# Altium PCB Project.PcbDoc
Units mm, origin at the board's own origin, x right, y up, seen from the top; angles counter-clockwise.
Board outline 49.15 x 37.34 mm, 2 copper layers (Top Layer, Bottom Layer); 34 components, 26 nets, 189 pads, 22 vias.
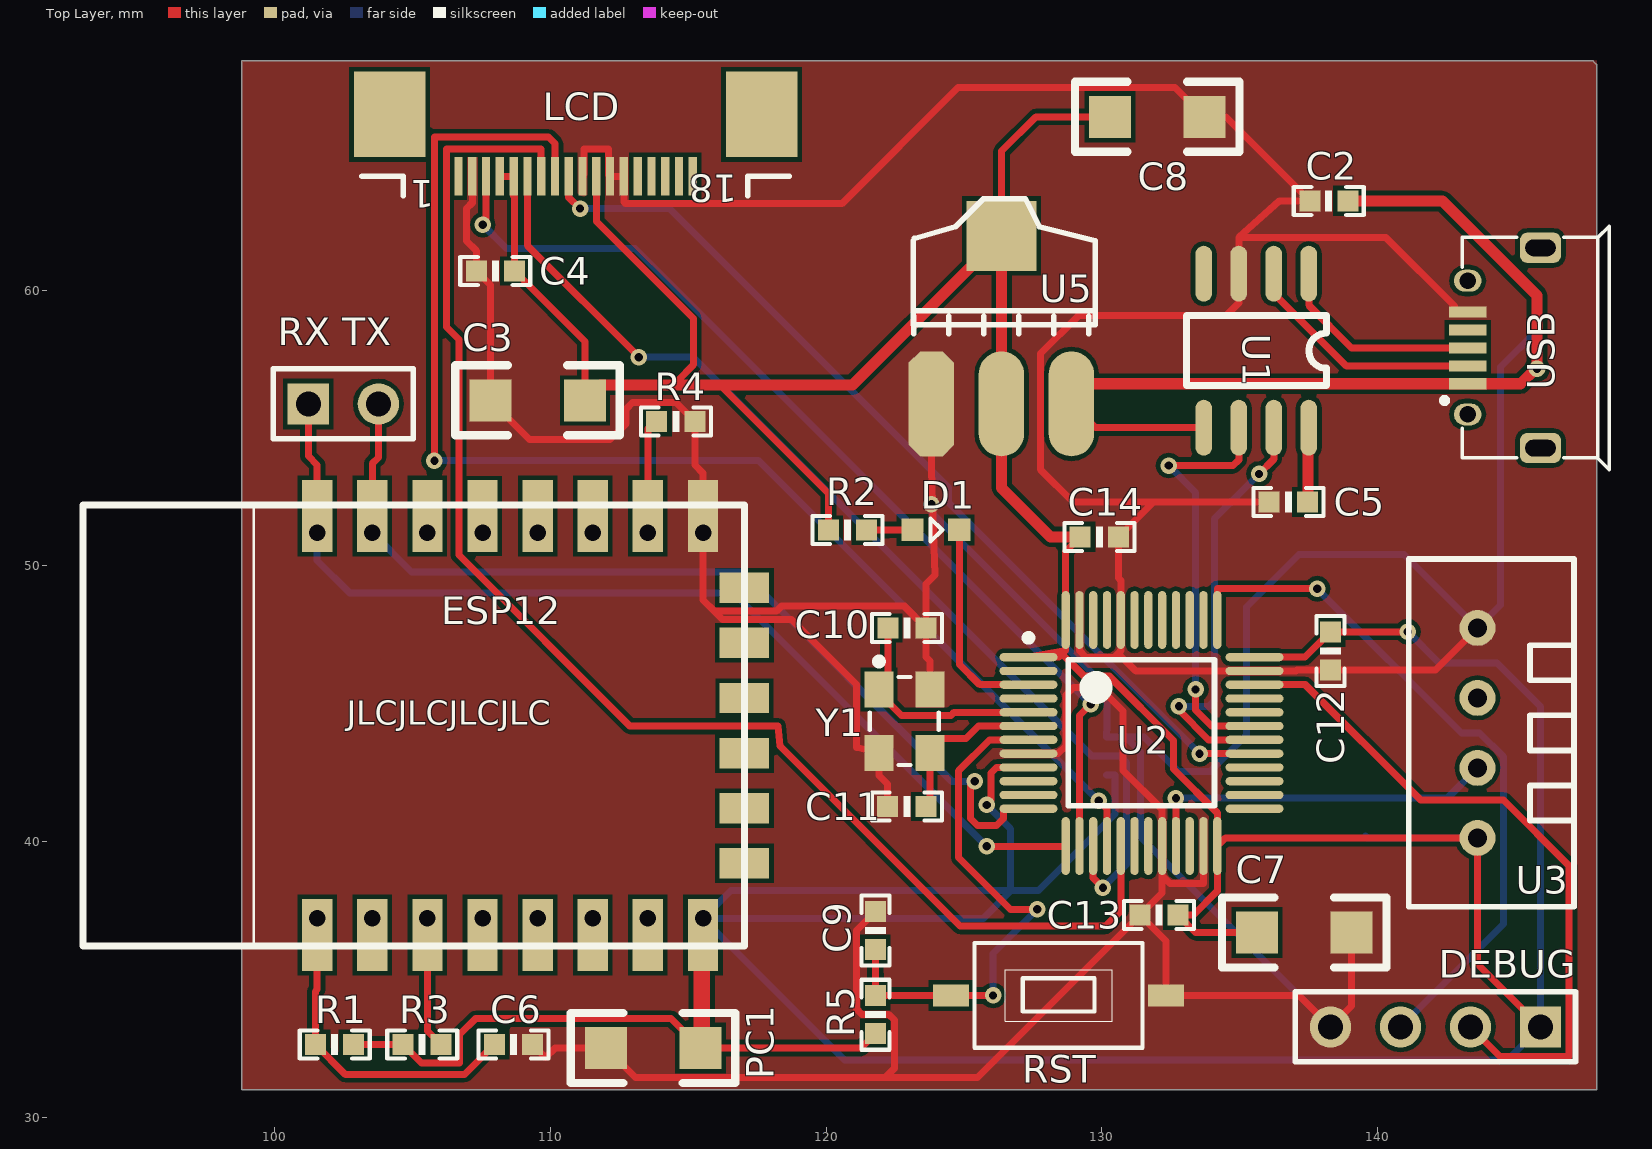
[diagram p0: Top Layer view]
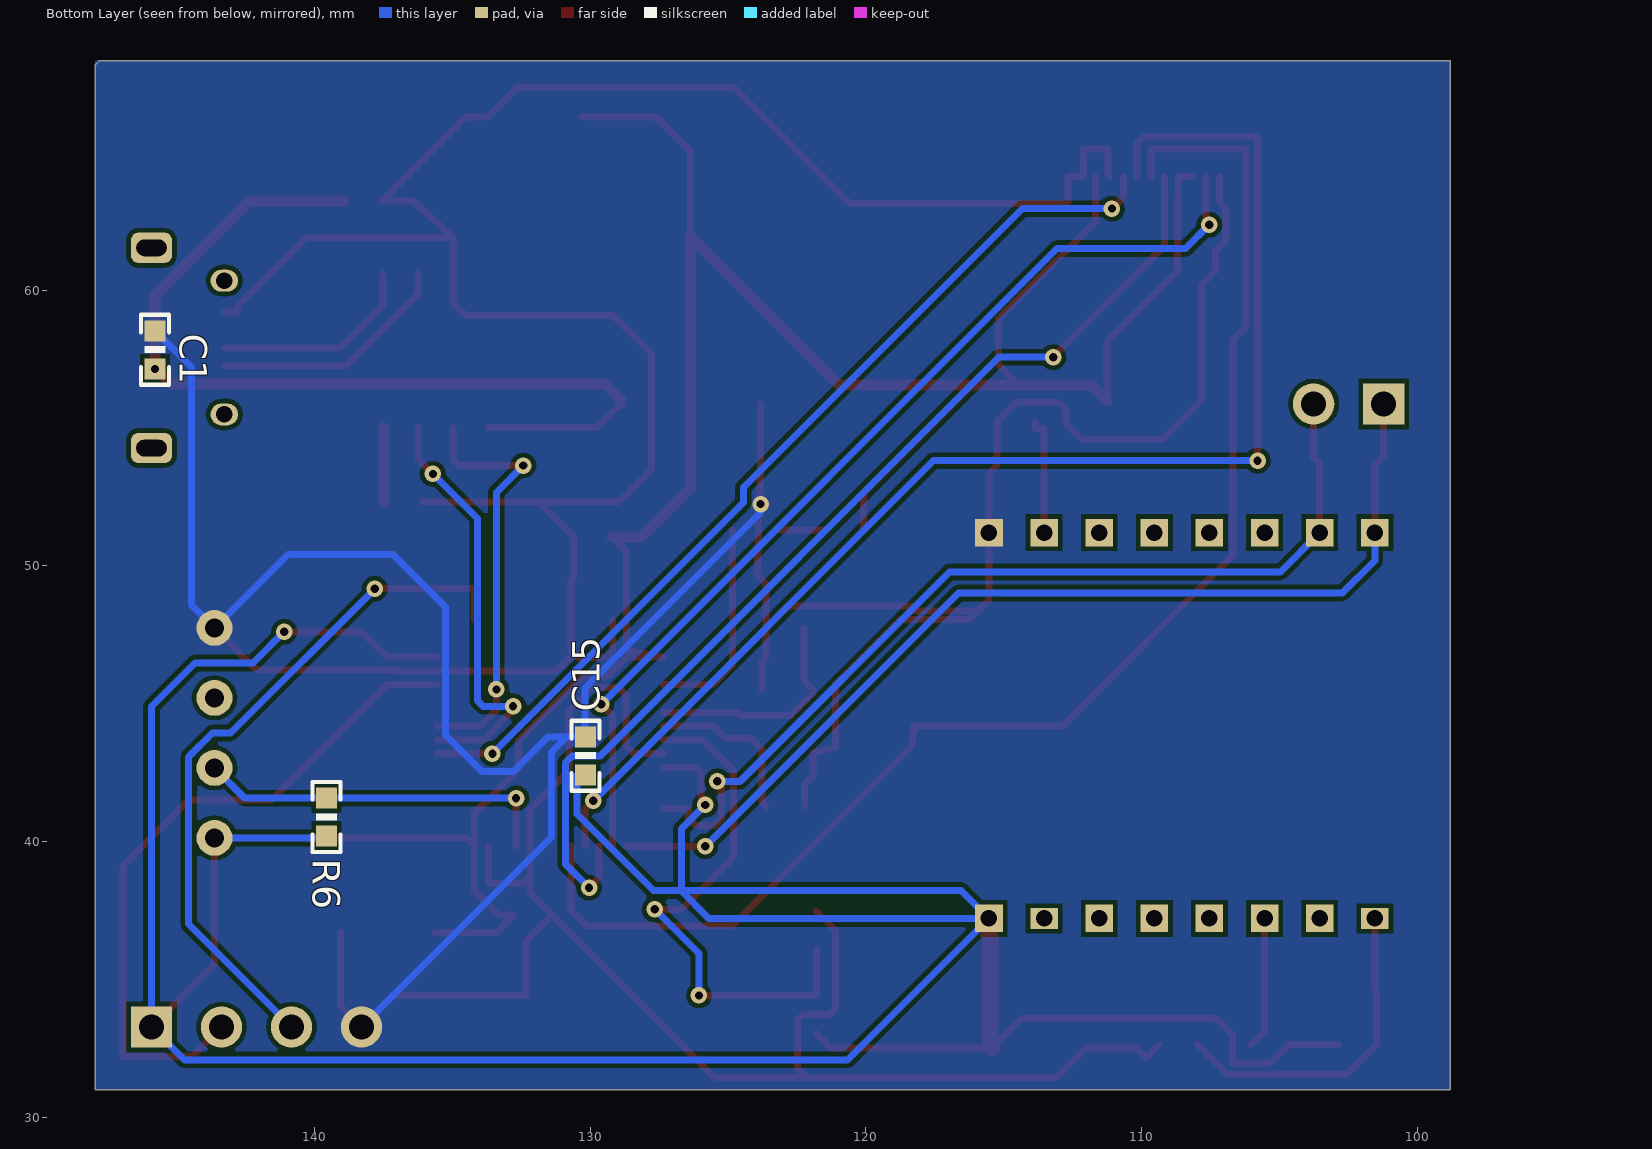
[diagram p1: Bottom Layer view, seen from below]

## Layer stack, top to bottom
Top Solder: solder mask 0.0102, Solder Resist, Dk 3.5
Top Layer: signal copper 0.0356
Dielectric 1: dielectric 0.32, FR-4, Dk 4.8
Bottom Layer: signal copper 0.0356
Bottom Solder: solder mask 0.0102, Solder Resist, Dk 3.5

## Board outline
98.806,30.988 98.806,68.326 147.828,68.326 147.955,68.199 147.955,30.988

## Design rules (kind name [scope] priority, off if disabled: settings)
Clearance [All] p1: gap=0.16 ignorepadtopadclearanceinfootprint=FALSE
PlaneConnect [All] p1: planeconnectstyle=Direct reliefexpansion=0.508 reliefentries=4 reliefconductorwidth=0.254 reliefairgap=0.254
PolygonConnect [All] p1: connectstyle=Direct reliefconductorwidth=0.254 reliefentries=4 polygonreliefangle="90 Angle" airgapwidth=0.254
RoutingVias [All] p1: holewidth=0.3 width=0.6 viastyle="Through Hole" minholewidth=0.3 minwidth=0.6 maxholewidth=0.711 maxwidth=1.27
SolderMaskExpansion [All] p1: expansion=0.102
Width [All] p1: maxlimit=1 minlimit=0.16 preferedwidth=0.254
29 further rules are at their usual default settings.

## Components (designator, comment, footprint, x,y, rotation, side; value= is the part's Value field where it differs from the comment)
C1 "Cap" 0603P 145.794,57.848 r270 bottom value=0.1uF
C2 "Cap" 0603P 138.239,63.248 r0 top value=0.1uF
C3 "Cap" 1206 107.823,56.007 r0 top value=0.1uF
C4 "Cap" 0603P 108.001,60.706 r0 top value=0.1uF
C5 "Cap" 0603P 136.779,52.324 r180 top value=0.1uF
C6 "Cap" 0603P 108.661,32.639 r180 top value=0.1uF
C7 "Cap" 1206 139.065,36.703 r180 top value=10uF
C8 "Cap" 1206 133.731,66.294 r180 top value=10uF
C9 "Cap" 0603P 121.793,36.779 r270 top value=0.1uF
C10 "Cap" 0603P 122.936,47.752 r0 top value=22pF
C11 "Cap" 0603P 122.936,41.275 r180 top value=22pF
C12 "Cap" 0603P 138.303,46.914 r90 top value=0.1uF
C13 "Cap" 0603P 132.08,37.338 r0 top value=0.1uF
C14 "Cap" 0603P 129.921,51.054 r180 top value=0.1uF
C15 "Cap" 0603P 130.173,43.116 r270 bottom value=0.1uF
D1 "LED0" SMDLED-0603 123.138,51.308 r0 top
DEBUG "Header 4" HDR1X4 145.923,33.274 r180 top (schematic designator P2)
ESP12 "ESP12" "ESP-12E&F Module" 109.287,44.211 r90 top (schematic designator U4)
LCD "1.8寸SPI屏" "FPC0.5 18Pin" 111.085,66.694 r180 top (schematic designator *1)
PC1 "" 1206 115.443,32.512 r180 top value=10uF
R1 "10K" 0603P 102.171,32.637 r180 top
R2 "Res2" 0603P 120.777,51.308 r0 top value=1K
R3 "1K" 0603P 105.346,32.637 r180 top
R4 "1K" 0603P 114.554,55.245 r180 top
R5 "" 0603P 121.791,33.718 r90 top value=10K
R6 "10K" 0603P 139.573,40.894 r270 bottom
RST "KEY" KEY_SOP3625 132.334,34.417 r180 top (schematic designator K1)
"RX TX" "Header 2" HDR1X2 101.219,55.88 r0 top (schematic designator P1)
U1 "CH330N" sop8 137.541,60.579 r270 top
U2 "STM32F103C8T6" LQFP-48 131.445,43.942 r0 top
U3 "DHT11" DHT11 143.637,40.132 r90 top
U5 "AMS1117-3.3" AMS1117 123.824,55.882 r0 top locked
USB "USB-AB" USB_AB 145.923,57.912 r270 top (schematic designator USB?)
Y1 "25Mhz" XTAL3225 121.92,45.518 r270 top

## Footprints (in the part's own frame and the unit in brackets; to place one, negate y for a bottom-side part, rotate by r counter-clockwise, add the part's x,y. Pads: shape width x height; smd on the part's side, far side on the other; paste and mask are expansions set on the pad)
0603P [mil]
  rect 30x30 smd: 1(-27,0) 2(27.5,-0.06)
  silkscreen extent -50,-20 50,20
1206 [mil]
  rect 60x60 smd: 1(0,0) 2(135,0)
  silkscreen extent -50,-50 185,50
AMS1117 [mil]
  oct 65x150 smd: 1(0.03,-0.06)
  oval 65x150 smd: 2(100.03,-0.06) 3(200.03,-0.06)
  rect 100x100 smd: 4(100.03,239.94)
  silkscreen extent -26,100 234,293
DHT11 [mm]
  round 1.3 hole 0.7: 1(0,0) 2(2.54,0) 3(5.08,0) 4(7.62,0)
  silkscreen extent -2.5,-3.5 10.12,2.5
"ESP-12E&F Module" [mm]
  rect 2.6x1.1 smd: 1(-7.6,7.75) 2(-7.6,5.75) 3(-7.6,3.75) 4(-7.6,1.75) 5(-7.6,-0.25) 6(-7.6,-2.25) 7(-7.6,-4.25) 8(-7.6,-6.25) 15(7.6,-6.25) 16(7.6,-4.25) 17(7.6,-2.25) 18(7.6,-0.25) 19(7.6,1.75) 20(7.6,3.75) 21(7.6,5.75) 22(7.6,7.75)
  rect 0.762x1 hole 0.6: 1(-7,7.75) 7(-7,-4.25)
  rect 0.762x1 / inner rect 0.762x1 / far side rect 1x1 hole 0.6: 2(-7,5.75) 3(-7,3.75) 4(-7,1.75) 5(-7,-0.25) 6(-7,-2.25) 8(-7,-6.25) 15(7,-6.25) 16(7,-4.25) 17(7,-2.25) 18(7,-0.25) 19(7,1.75) 20(7,3.75) 21(7,5.75) 22(7,7.75)
  rect 1.1x1.8 smd: 9(-5,-7.75) 10(-3,-7.75) 11(-1,-7.75) 12(1,-7.75) 13(3,-7.75) 14(5,-7.75)
  silkscreen extent -8,-7.75 8,16.25
"FPC0.5 18Pin" [mm]
  rect 2.6x3.1 smd: 0(-6.58,0.309) 0(6.92,0.309)
  rect 0.3x1.4 smd: 1(4.42,2.559) 2(3.92,2.559) 3(3.42,2.559) 4(2.92,2.559) 5(2.42,2.559) 6(1.92,2.559) 7(1.42,2.559) 8(0.92,2.559) 9(0.42,2.559) 10(-0.08,2.559) 11(-0.58,2.559) 12(-1.08,2.559) 13(-1.58,2.559) 14(-2.08,2.559) 15(-2.58,2.559) 16(-3.08,2.559) 17(-3.58,2.559) 18(-4.08,2.559)
  silkscreen extent -7.58,2.56 7.92,3.26
HDR1X2 [mm] "Connector; Header; 2 Position"
  rect 1.5x1.5 hole 0.9: 1(0,0)
  round 1.5 hole 0.9: 2(2.54,0)
  silkscreen extent -1.27,-1.27 3.81,1.27
HDR1X4 [mm] "Connector; Header; 4 Position"
  rect 1.5x1.5 hole 0.9: 1(0,0)
  round 1.5 hole 0.9: 2(2.54,0) 3(5.08,0) 4(7.62,0)
  silkscreen extent -1.27,-1.27 8.89,1.27
KEY_SOP3625 [mm]
  rect 1.3x0.8 smd: 1(0,0) 2(7.8,0)
  silkscreen extent 0.85,-1.9 6.95,1.9
LQFP-48 [mm] "LQFP"
  oval 2.1x0.3 smd: 1(-4.1,2.75) 2(-4.1,2.25) 3(-4.1,1.75) 4(-4.1,1.25) 5(-4.1,0.75) 6(-4.1,0.25) 7(-4.1,-0.25) 8(-4.1,-0.75) 9(-4.1,-1.25) 10(-4.1,-1.75) 11(-4.1,-2.25) 12(-4.1,-2.75) 25(4.1,-2.75) 26(4.1,-2.25) 27(4.1,-1.75) 28(4.1,-1.25) 29(4.1,-0.75) 30(4.1,-0.25) 31(4.1,0.25) 32(4.1,0.75) 33(4.1,1.25) 34(4.1,1.75) 35(4.1,2.25) 36(4.1,2.75)
  oval 0.3x2.1 smd: 13(-2.75,-4.1) 14(-2.25,-4.1) 15(-1.75,-4.1) 16(-1.25,-4.1) 17(-0.75,-4.1) 18(-0.25,-4.1) 19(0.25,-4.1) 20(0.75,-4.1) 21(1.25,-4.1) 22(1.75,-4.1) 23(2.25,-4.1) 24(2.75,-4.1) 37(2.75,4.1) 38(2.25,4.1) 39(1.75,4.1) 40(1.25,4.1) 41(0.75,4.1) 42(0.25,4.1) 43(-0.25,4.1) 44(-0.75,4.1) 45(-1.25,4.1) 46(-1.75,4.1) 47(-2.25,4.1) 48(-2.75,4.1)
  silkscreen extent -4.22,-2.65 2.65,3.57, body extent -3.5,-3.5 3.5,3.5, height 1.6
SMDLED-0603 [mil]
  rect 32x32 smd: 1(0,0) 2(66.93,0)
  silkscreen extent 26,-17 42,17
sop8 [mil]
  oval 80x24 smd: 1(-1,-1) 2(-1,-51) 3(-1,-101) 4(-1,-151) 5(219,-151) 6(219,-101) 7(219,-51) 8(219,-1)
  silkscreen extent 59,-176 159,24, body extent -9,-174 229,24, height 63
USB_AB [mm]
  rect 0.4x1.35 smd: 1(1.3,-2.642) 2(0.65,-2.642) 3(0,-2.642) 4(-0.65,-2.642) 5(-1.3,-2.642)
  oval 0.8x1 hole 0.6: 6(-2.438,-2.642) 9(2.413,-2.642)
  rrect50% 1.1x1.5 hole 0.6 slot 1.1 at 90 deg: 7(-3.632,0) 8(3.632,0)
  silkscreen extent -4.42,-3.58 4.42,2.49
XTAL3225 [mm]
  rect 1.3x1.05 smd: 1(0,0) 2(2.3,0) 3(2.3,1.85) 4(0,1.85)
  silkscreen extent -1.14,-0.33 2.74,2.17

## Part data
C1 C2 C3 C4 C5 C6 C7 C8 C9 C10 C11 C12 C13 C14 C15: "Capacitor", LatestRevisionDate=17-Jul-2002, LatestRevisionNote="Re-released for DXP Platform.", PackageDescription="Radial Cap, Thru-Hole; 2 Leads; 0.3 in Pin Spacing", PackageReference=RAD-0.3, Published=8-Jun-2000, Publisher="Altium Limited"
D1: "Typical INFRARED GaAs LED", LatestRevisionDate=08-Jul-2005, LatestRevisionNote="Mech Layer 1 removed.", PackageDescription="LED; 2 Leads", PackageReference=LED-0, Published=8-Jun-2000, Publisher="Altium Limited"
DEBUG: "Header, 4-Pin", LatestRevisionDate=17-Jul-2002, LatestRevisionNote="Re-released for DXP Platform.", Publisher="Altium Limited"
ESP12: library part "ESP-12E&F Module", "ESP-12E&F Module"
PC1: library part "Cap Pol3", "Polarized Capacitor (Surface Mount)", LatestRevisionDate=29-May-2009, LatestRevisionNote="IPC-7351 Footprint Added.", PackageDescription="Chip Capacitor", PackageReference=C0805, Published=8-Jun-2000, Publisher="Altium Limited"
R1 R3 R4 R6: library part R
R2: "Resistor", LatestRevisionDate=17-Jul-2002, LatestRevisionNote="Re-released for DXP Platform.", PackageDescription="Axial Device, Thru-Hole; 2 Leads; 0.4 in Pin Spacing", PackageReference=AXIAL-0.4, Published=8-Jun-2000, Publisher="Altium Limited"
R5: library part Res2, "Resistor", LatestRevisionDate=17-Jul-2002, LatestRevisionNote="Re-released for DXP Platform.", PackageReference=AXIAL-0.4, Published=8-Jun-2000, Publisher="Altium Limited"
RST: library part KEY_2, "Switch", LatestRevisionDate=17-Jul-2002, LatestRevisionNote="Re-released for DXP Platform.", PackageReference=SPST-2, Published=24-Mar-1999, Publisher="Altium Limited"
"RX TX": "Header, 2-Pin", LatestRevisionDate=17-Jul-2002, LatestRevisionNote="Re-released for DXP Platform.", Publisher="Altium Limited"
U3: "数字温湿度传感器"
U5: library part AMS1117
USB: "MicroUSB"
Y1: library part XTAL_3225, "3225贴片无源晶振"

## Via types
v1: diameter 0.6, hole 0.3, Top Layer to Bottom Layer, tented both sides, 22 vias

## Nets (pads, with @x,y where several pads share a name; then routed paths per layer and width w, separated by ;. In a path a pad name is that pad's centre, name@x,y a point inside that pad or via, vN(x,y) a via of type N, cw(c..) or ccw(c..) an arc to the next point about the centre after c; other vN are vias at no path point)
5V: C1.2 C2.2 U1.5 U5.3 USB.1 | length 33.6
  Top Layer w0.254: U5.3 129.769,55.016 U1.5
  Top Layer w0.4: U5.3 128.905,56.034 129.483,56.612 USB.1 145.204,56.612 145.742,57.15 v1(145.796,57.15) 145.796,59.817 142.367,63.246 C2.2
DATA: R6.1 U2.21 U3.2 | length 13.1
  Top Layer w0.254: U2.21 v1(132.695,41.574)
  Bottom Layer w0.254: v1(132.695,41.574) 142.539,41.574 U3.2
ESP_RST: C6.2 ESP12.1 R1.2 | length 12
  Top Layer w0.254: ESP12.1@101.537,37.211 101.537,36.611 101.537,34.633 101.473,34.569 R1.2 102.557,31.555 106.877,31.555 C6.2
GND: C1.1 C2.1 C3.1 C4.1 C5.2 C6.1 C7.1 C8.1 C9.1 C10.2 C11.2 C12.1 C13.1 C14.1 C15.1 DEBUG.4 ESP12.15 LCD.2 LCD.10 LCD.12 LCD.13 PC1.2 R4.1 RST.1 U1.3 U2.8 U2.20 U2.23 U2.35 U2.44 U2.47 U3.4 U5.1 USB.5 Y1.2 Y1.4 | length 268.7
  Top Layer w0.254: LCD.2 107.165,63.178 106.957,62.969 106.957,61.795 107.315,61.437 C4.1 107.823,60.198 C3.1 109.245,54.585 112.166,54.585 112.751,55.169 112.751,55.702 112.979,55.931 114.554,55.931 R4.1 115.24,53.663 115.537,53.365 115.537,51.811 115.537,51.211 115.537,48.768 115.943,48.362 ; C6.1 109.825,32.161 110.175,32.512 PC1.2 113.081,31.445 122.149,31.445 ; LCD.10 111.227,64.197 111.227,65.126 112.116,65.126 112.116,64.184 LCD.12 LCD.13 112.665,63.211 112.732,63.144 120.574,63.144 124.79,67.361 132.664,67.361 C8.1 134.507,66.294 C2.1 136.45,63.248 134.976,61.925 ; C9.1 121.107,36.779 121.107,33.934 121.31,33.731 122.276,33.731 122.479,33.528 122.479,31.775 122.149,31.445 ; C11.2 122.237,42.088 121.92,42.405 Y1.2 121.107,43.422 121.107,45.695 118.745,48.057 116.248,48.057 115.943,48.362 ; Y1.4 123.77,46.558 123.634,46.694 C10.2 ; v1(123.825,52.248) 123.867,52.248 v1@123.867,52.249 ; U5.1 123.825,53.518 ; U2.8 128.422,43.192 128.702,43.471 128.702,45.314 128.974,45.585 129.929,45.585 130.782,44.732 130.782,42.587 132.195,41.173 U2.20 132.195,38.772 ; U2.47 129.195,46.929 129.438,46.685 130.454,46.685 130.6,46.831 ; U2.23 133.695,38.481 132.486,38.481 132.195,38.772 ; C5.2 131.878,52.326 ; C7.1 139.065,34.036 DEBUG.4 137.16,34.417 RST.1 132.334,36.398 C13.1 ; USB.5 142.799,59.212 142.799,59.436 140.31,61.925 134.976,61.925 ; U3.4 142.113,46.228 C12.1 137.086,46.228 137.05,46.192 U2.35 131.239,46.192 130.6,46.831 ; 115.943,48.362 118.212,48.362 118.389,48.539 122.845,48.539 C10.2 ; 122.149,31.445 125.501,31.445 C13.1 ; C10.2 123.634,49.352 123.952,49.67 v1@123.867,52.249 ; 123.825,53.518 v1@123.867,52.249 ; 123.825,53.518 v1@123.867,52.249 ; 130.6,46.831 130.695,46.926 U2.44 130.695,49.479 130.607,49.567 C14.1 131.878,52.326 ; C13.1 132.195,38.139 132.195,38.772 ; 131.878,52.326 128.954,52.326 127.787,53.492 127.787,57.709 129.159,59.08 134.518,59.08 134.976,59.538 U1.3 134.976,61.925
  Bottom Layer w0.254: v1(123.825,52.248) 123.825,51.943 130.2,45.568 130.2,44.232 C15.1 130.861,43.802 ; DEBUG.4 131.417,40.16 131.417,43.246 130.861,43.802 ; C1.1 144.475,57.215 144.475,48.59 U3.4 140.97,50.419 137.16,50.419 135.255,48.514 135.255,43.866 133.934,42.545 132.791,42.545 131.534,43.802 130.861,43.802
LCD_DC: LCD.8 U2.16 | length 48.4
  Top Layer w0.254: v1(105.791,53.823) 105.791,65.557 109.931,65.557 110.165,65.324 LCD.8 ; v1(129.896,41.478) 130.195,41.179 U2.16
  Bottom Layer w0.254: v1(105.791,53.823) 117.551,53.823 v1(129.896,41.478)
LCD_RST: LCD.9 U2.29 | length 34.3
  Top Layer w0.254: LCD.9 110.665,63.376 v1(111.074,62.967) ; v1(133.553,43.192) U2.29
  Bottom Layer w0.254: v1(111.074,62.967) 114.325,62.967 124.448,52.844 124.448,52.297 v1(133.553,43.192)
NetC5_1: C5.1 U1.8 | length 2.7
  Top Layer w0.4: C5.1 137.49,52.349 137.49,54.991 U1.8
NetC9_2: C9.2 R5.2 RST.2 U2.7 | length 19.5
  Top Layer w0.254: C9.2 121.791,35.231 121.793,35.23 R5.2 RST.2 v1(126.06,34.417) ; U2.7 125.933,43.692 124.81,42.569 124.81,39.426 126.695,37.541 v1(127.66,37.541)
  Bottom Layer w0.254: v1(126.06,34.417) 126.06,35.941 v1(127.66,37.541)
NetD1_1: D1.1 R2.2 | length 1.7
  Top Layer w0.254: R2.2 122.301,51.306 122.303,51.308 D1.1
NetD1_2: D1.2 U2.3 | length 7.7
  Top Layer w0.254: D1.2 124.838,46.432 125.578,45.692 U2.3
NetESP12_3: ESP12.3 R3.1 | length 4.8
  Top Layer w0.254: ESP12.3@105.537,37.211 105.537,36.611 105.537,33.133 R3.1
NetESP12_16: ESP12.16 R4.2 | length 4.4
  Top Layer w0.254: ESP12.16@113.537,51.211 113.537,51.811 113.537,54.993 113.855,54.993 R4.2
NetU1_1: U1.1 USB.3 | length 7.6
  Top Layer w0.254: U1.1 137.516,59.461 139.065,57.912 USB.3
NetU1_2: U1.2 USB.2 | length 8.8
  Top Layer w0.254: U1.2 136.246,59.893 138.877,57.262 USB.2
OSC_IN: C10.1 U2.5 Y1.1 | length 8.3
  Top Layer w0.254: C10.1 122.25,45.849 Y1.1 121.92,45.393 122.732,44.581 124.527,44.581 124.638,44.692 U2.5
OSC_OUT: C11.1 U2.6 Y1.3 | length 6.1
  Top Layer w0.254: C11.1 123.77,41.423 Y1.3 123.77,43.343 124.168,43.741 125.075,43.741 125.526,44.192 U2.6
SPI1_MOSI: LCD.7 U2.17 | length 51.9
  Top Layer w0.254: LCD.7 109.665,65.126 106.223,65.126 106.223,58.674 106.68,58.217 106.68,50.394 112.878,44.196 118.262,44.196 118.33,43.468 124.866,36.932 130.136,36.932 130.695,37.49 U2.17
SPI1_NSS: LCD.3 U2.14 | length 36.4
  Top Layer w0.254: v1(107.544,62.382) 107.665,62.504 LCD.3 ; U2.14 129.195,44.577 v1(129.601,44.983)
  Bottom Layer w0.254: v1(107.544,62.382) 108.407,61.519 113.066,61.519 v1(129.601,44.983)
SPI1_SCK: LCD.6 U2.15 | length 38.6
  Top Layer w0.254: LCD.6 109.165,61.62 v1(113.208,57.578) ; U2.15 129.695,38.682 v1(130.048,38.329)
  Bottom Layer w0.254: v1(113.208,57.578) 115.167,57.578 129.641,43.104 130.658,43.104 130.897,42.865 130.897,39.177 v1(130.048,38.329)
SWCLK: DEBUG.3 U2.37 | length 25.4
  Top Layer w0.254: U2.37 134.195,49.174 v1(137.82,49.174)
  Bottom Layer w0.254: v1(137.82,49.174) 143.053,43.942 143.713,43.942 144.577,43.078 144.577,37.008 DEBUG.3
SWDIO: DEBUG.2 U2.34 | length 25.1
  Top Layer w0.254: U2.34 137.389,45.692 141.577,41.504 144.577,41.504 146.964,39.116 146.964,32.207 144.45,32.207 DEBUG.2
UART2_RX: "RX TX.1" ESP12.22 U2.13 | length 37.3
  Top Layer w0.254: 101.219,55.88 101.219,53.988 101.537,53.67 101.537,51.811 ESP12.22@101.537,51.211 ; v1(125.832,39.827) 128.695,39.827 U2.13
  Bottom Layer w0.254: ESP12.22@101.537,51.211 101.537,50.203 102.718,49.022 116.637,49.022 v1(125.832,39.827)
UART2_TX: "RX TX.2" ESP12.21 U2.12 | length 34.4
  Top Layer w0.254: ESP12.21@103.537,51.211 103.537,51.811 103.537,53.721 103.759,53.943 103.759,55.88 ; v1(125.4,42.189) 125.245,42.034 125.245,40.843 125.501,40.586 126.187,40.586 126.441,40.84 126.441,41.192 U2.12
  Bottom Layer w0.254: ESP12.21@103.537,51.211 104.964,49.784 116.967,49.784 124.562,42.189 v1(125.4,42.189)
USART1_RX: U1.6 U2.31 | length 15.4
  Top Layer w0.254: v1(132.436,53.645) 134.772,53.645 134.976,53.848 U1.6 ; v1(133.408,45.521) 133.408,44.769 133.985,44.192 U2.31
  Bottom Layer w0.254: v1(132.436,53.645) 133.408,52.672 v1(133.408,45.521)
USART1_TX: U1.7 U2.30 | length 15.5
  Top Layer w0.254: v1(132.804,44.907) 132.804,44.767 133.879,43.692 U2.30 ; v1(135.712,53.34) 136.246,53.873 U1.7
  Bottom Layer w0.254: v1(132.804,44.907) 133.886,44.907 134.089,45.11 134.089,51.717 v1(135.712,53.34)
VCC: C3.2 C4.2 C7.2 C8.2 C12.2 C13.2 C14.2 C15.2 DEBUG.1 ESP12.8 LCD.4 LCD.5 LCD.11 PC1.1 R1.1 R2.1 R3.2 R5.1 R6.2 U2.1 U2.9 U2.24 U2.36 U2.48 U3.1 U5.2 U5.4 | length 226.9
  Top Layer w0.254: R1.1 103.734,32.637 103.735,32.639 R3.2 105.318,31.969 106.705,31.969 106.705,32.995 107.29,33.579 114.376,33.579 PC1.1 121.271,32.512 R5.1 ; LCD.4 LCD.5 108.665,63.431 108.699,63.396 C4.2 111.252,58.152 C3.2 ; LCD.11 111.665,62.503 115.189,58.979 115.189,57.302 114.605,56.718 ; ESP12.8@115.537,36.611 115.537,36.906 ESP12.8@115.537,37.211 ; 116.151,56.569 120.091,52.629 R2.1 ; v1(125.832,41.329) 125.987,41.484 125.987,42.492 126.187,42.692 U2.9 ; U5.4 126.365,65.049 127.61,66.294 C8.2 ; C14.2 128.695,50.528 U2.48 128.695,46.939 ; U2.36 137.384,46.692 C12.2 v1(141.11,47.612) ; C7.2 133.412,36.703 C13.2 133.33,37.336 134.195,38.202 U2.24 ; DEBUG.1 143.637,35.56 U3.1 134.485,40.132 U2.24 ; 128.562,46.806 128.695,46.939 ; 128.562,46.806 128.448,46.692 U2.1 128.695,46.939 ; 128.562,46.806 129.369,45.999 130.277,45.999 132.602,43.674 132.602,42.639 134.195,41.046 U2.24
  Top Layer w0.4: C3.2 111.814,56.569 116.151,56.569 120.958,56.569 U5.4 U5.2 126.365,52.832 128.141,51.056 C14.2
  Top Layer w0.6: PC1.1 115.49,32.559 115.49,36.564 ESP12.8@115.537,36.611
  Bottom Layer w0.254: v1(125.832,41.329) 126.695,40.465 126.695,38.225 ; C15.2 130.483,42.418 130.483,40.998 127.709,38.225 126.695,38.225 ; R6.2 139.638,40.132 U3.1 ; v1(141.11,47.612) 142.24,46.482 144.348,46.482 145.923,44.907 DEBUG.1 144.729,32.08 120.668,32.08 ESP12.8@115.537,37.211 ; ESP12.8@115.537,37.211 125.705,37.211 126.695,38.202 126.695,38.225 ; ESP12.8@115.537,37.211 116.551,38.225 126.695,38.225
pads on no net: ESP12.2 ESP12.4 ESP12.5 ESP12.6 ESP12.7 ESP12.9 ESP12.10 ESP12.11 ESP12.12 ESP12.13 ESP12.14 ESP12.17 ESP12.18 ESP12.19 ESP12.20 LCD.0 LCD.1 LCD.14 LCD.15 LCD.16 LCD.17 LCD.18 U1.4 U2.2 U2.4 U2.10 U2.11 U2.18 U2.19 U2.22 U2.25 U2.26 U2.27 U2.28 U2.32 U2.33 U2.38 U2.39 U2.40 U2.41 U2.42 U2.43 U2.45 U2.46 U3.3 USB.4 USB.6 USB.7 USB.8 USB.9

## Polygon pours and split planes (outlines as drawn)
GND on Top Layer "Top Layer-GND" (solid, remove dead copper, pour order 0): 98.806,68.326 147.955,68.326 147.955,30.988 98.806,30.988
GND on Bottom Layer "Bottom Layer-GND" (solid, remove dead copper, pour order 2): 98.806,68.326 147.955,68.326 147.955,30.988 98.806,30.988

## Silkscreen, mask and mechanical layers (free items; w line width, h text height)
Top Overlay:
  text "JLCJLCJLCJLC" at 102.616,43.942 h1.5
Mechanical 1:
  the board outline again, w0.16

## Text inside footprints (layer, text, board x,y; h text height)
LCD: Top Overlay "1" at 105.785,63.994 h1 r180; Top Overlay "18" at 116.785,64.194 h1 r180